# Altium PCB PCB final.PcbDoc
Units mm, origin at the board's own origin, x right, y up, seen from the top; angles counter-clockwise.
Board outline 69.85 x 58.55 mm, 4 copper layers (L1(signal), L2(GND), L3(GND), L4(signal)), stack 1.591 mm thick; 42 components, 40 nets, 177 pads, 159 vias.
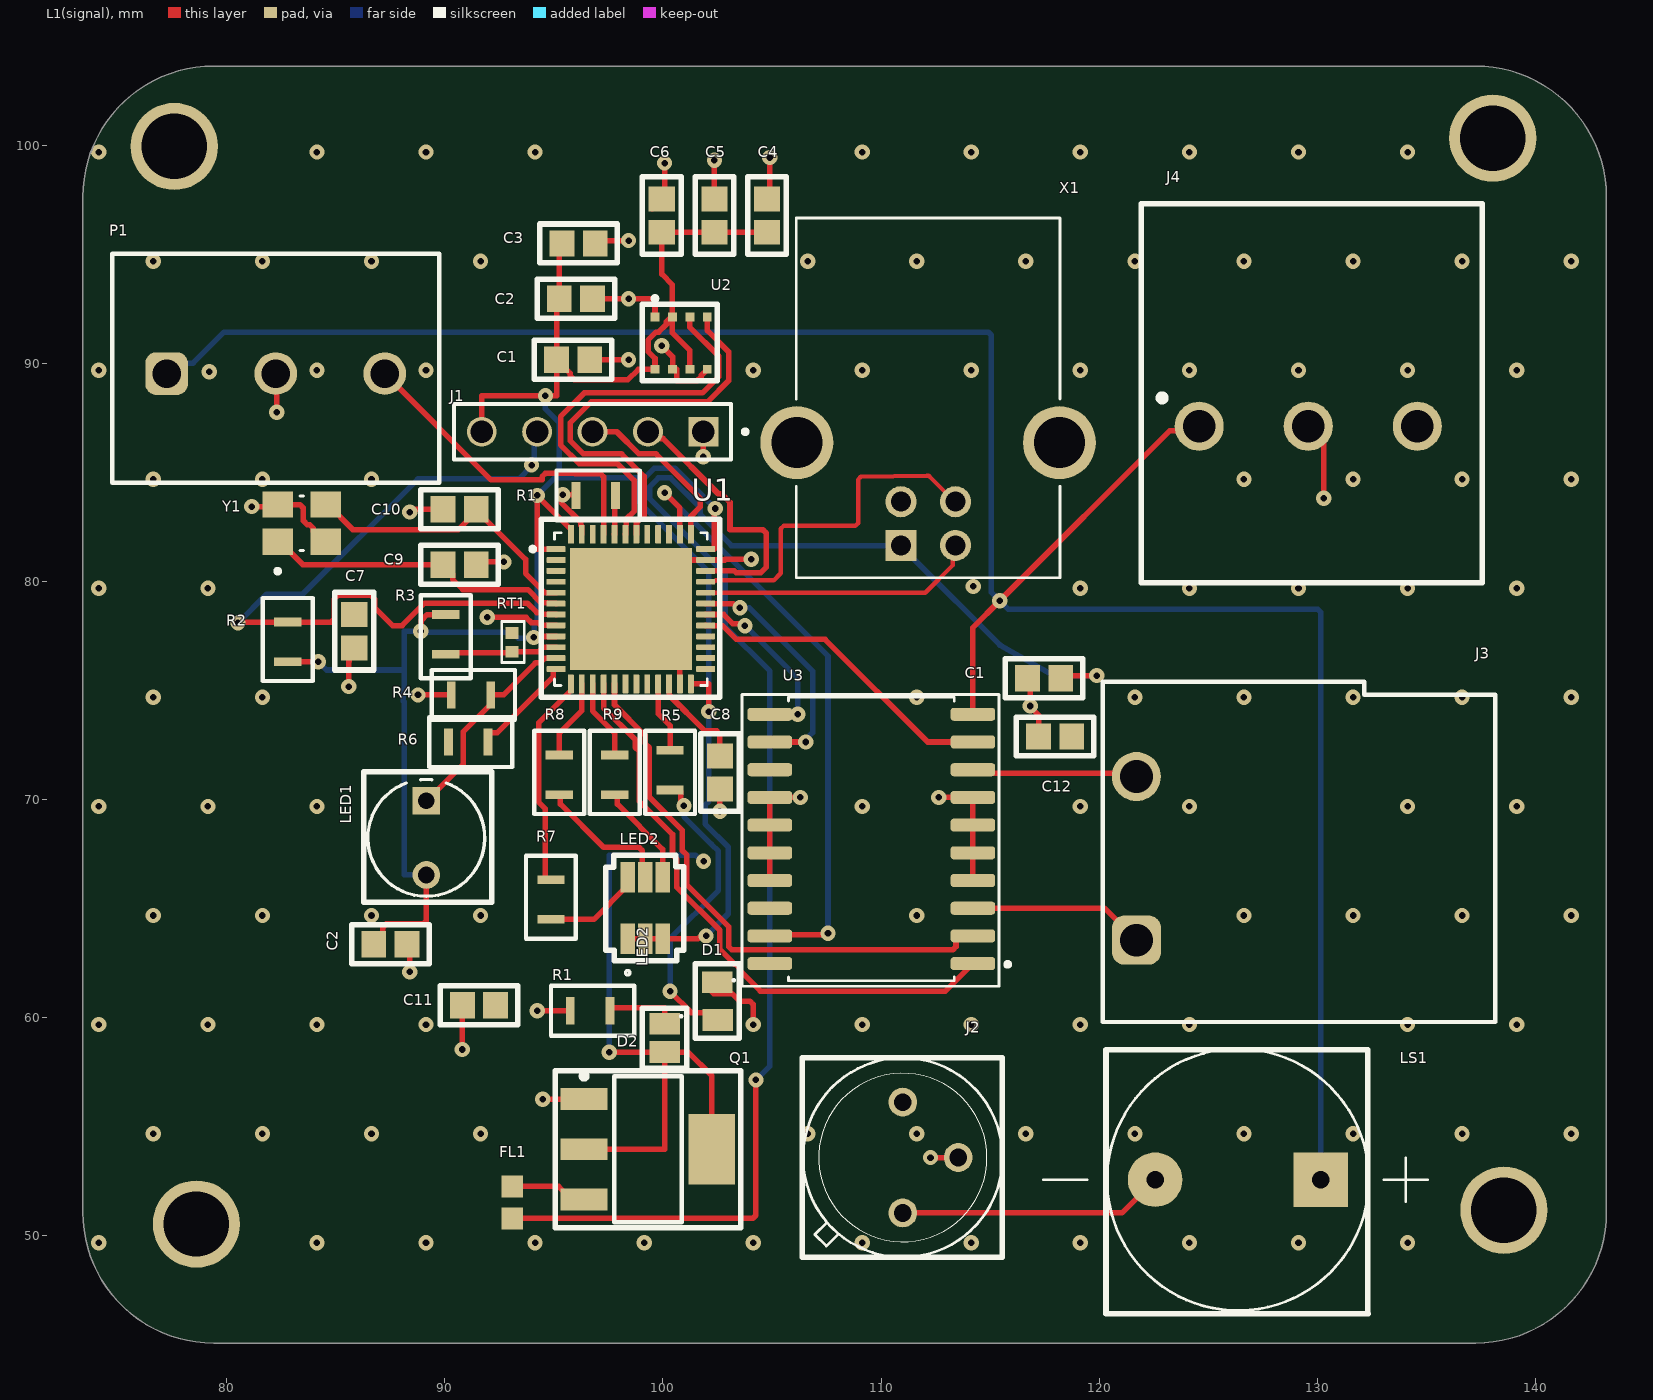
[diagram p0: L1(signal) view]
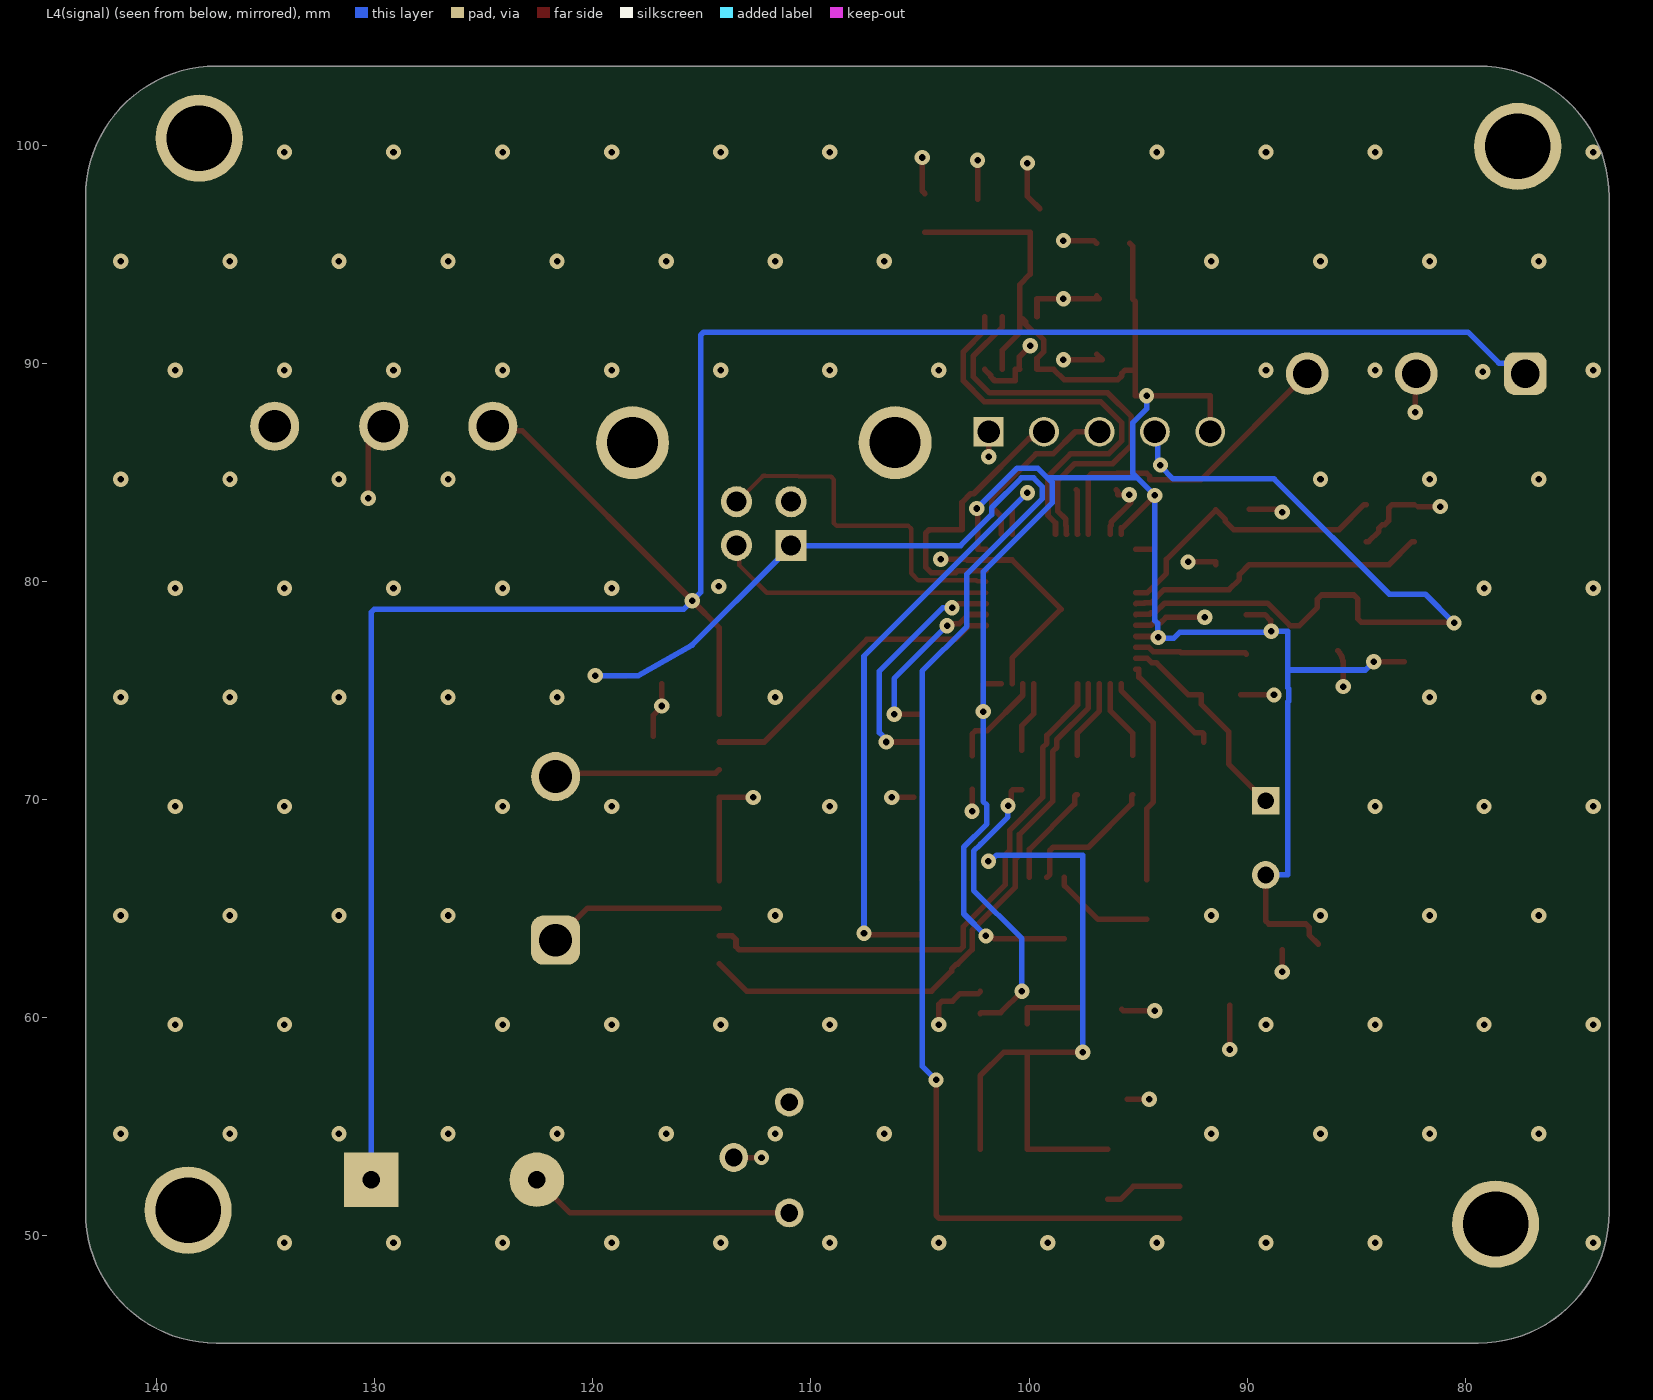
[diagram p1: L4(signal) view, seen from below]
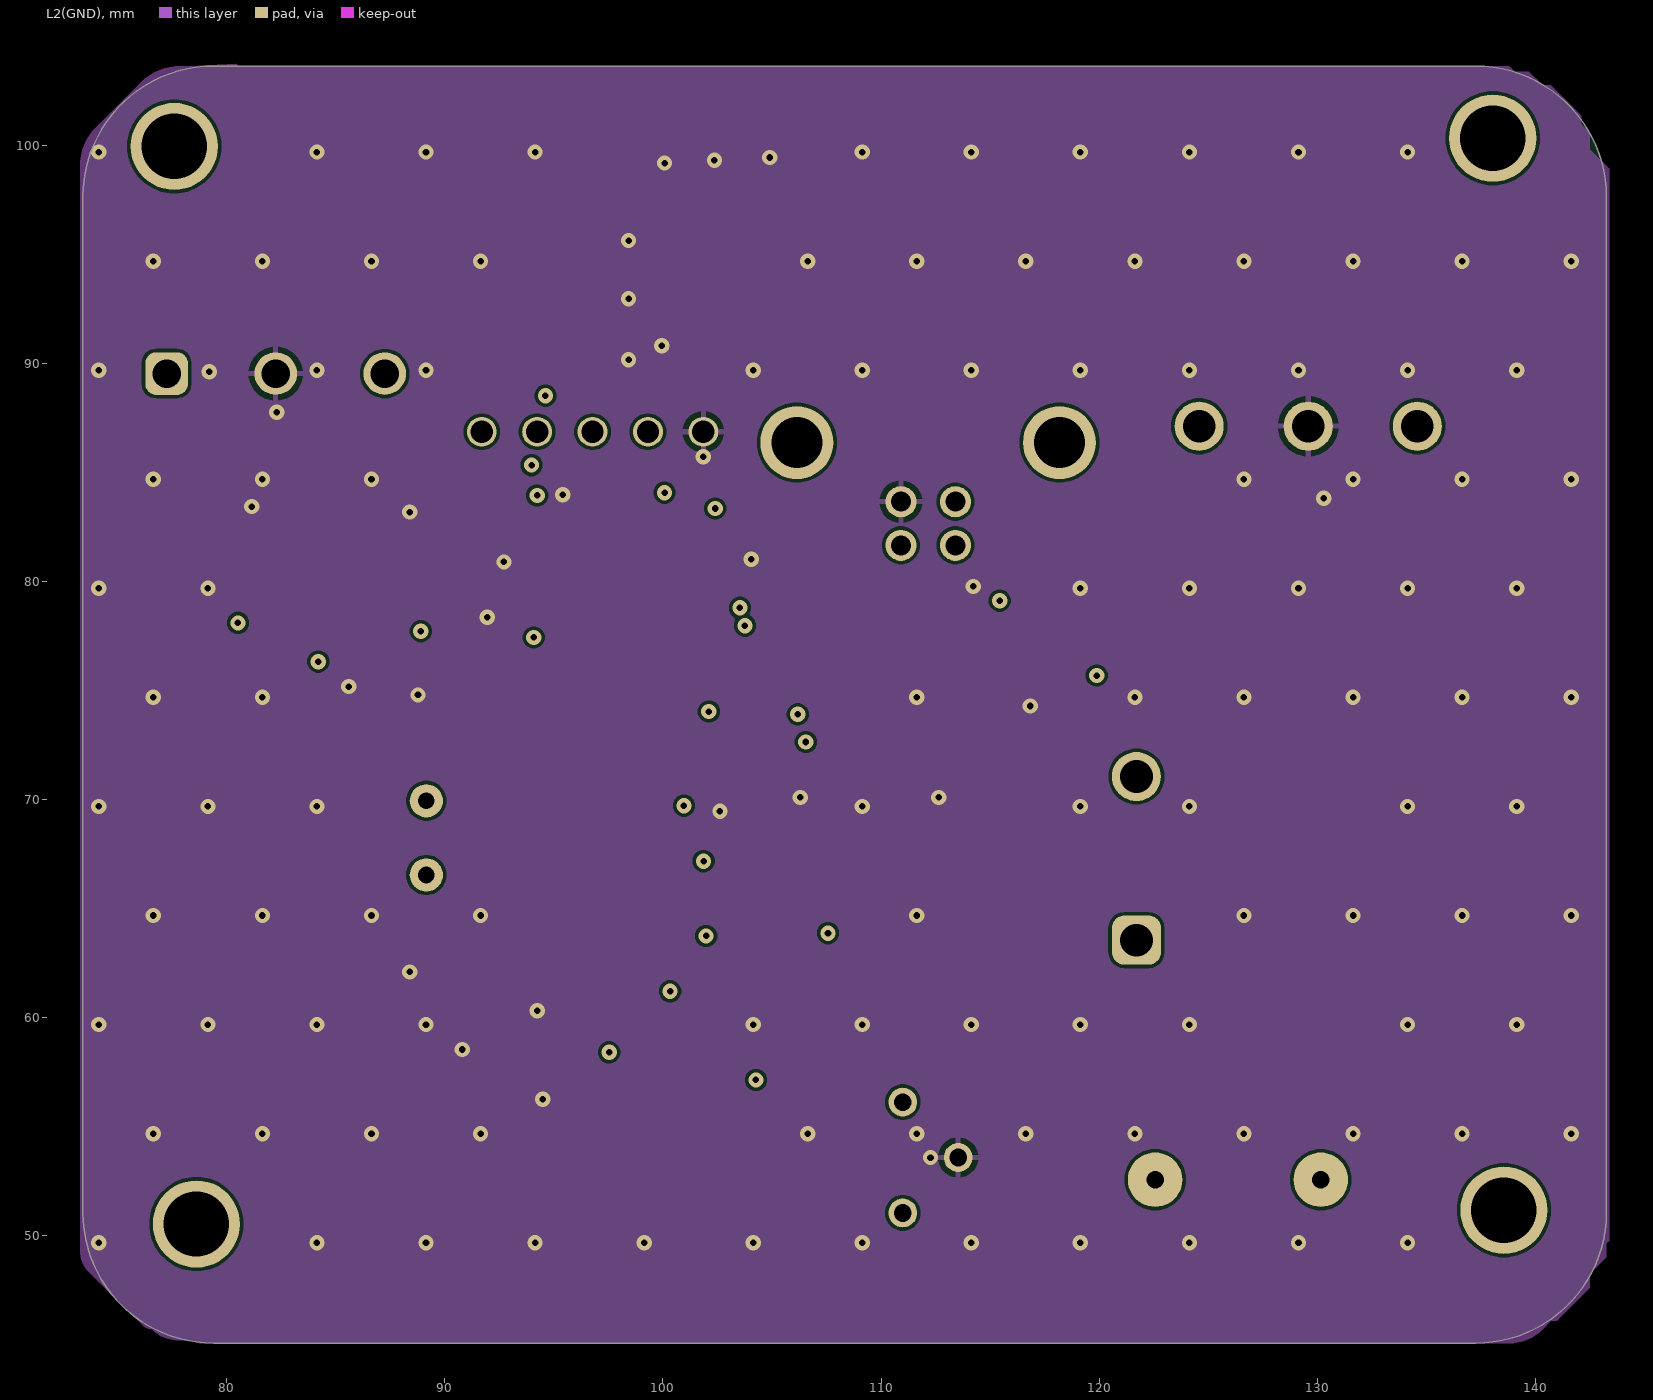
[diagram p2: L2(GND)]
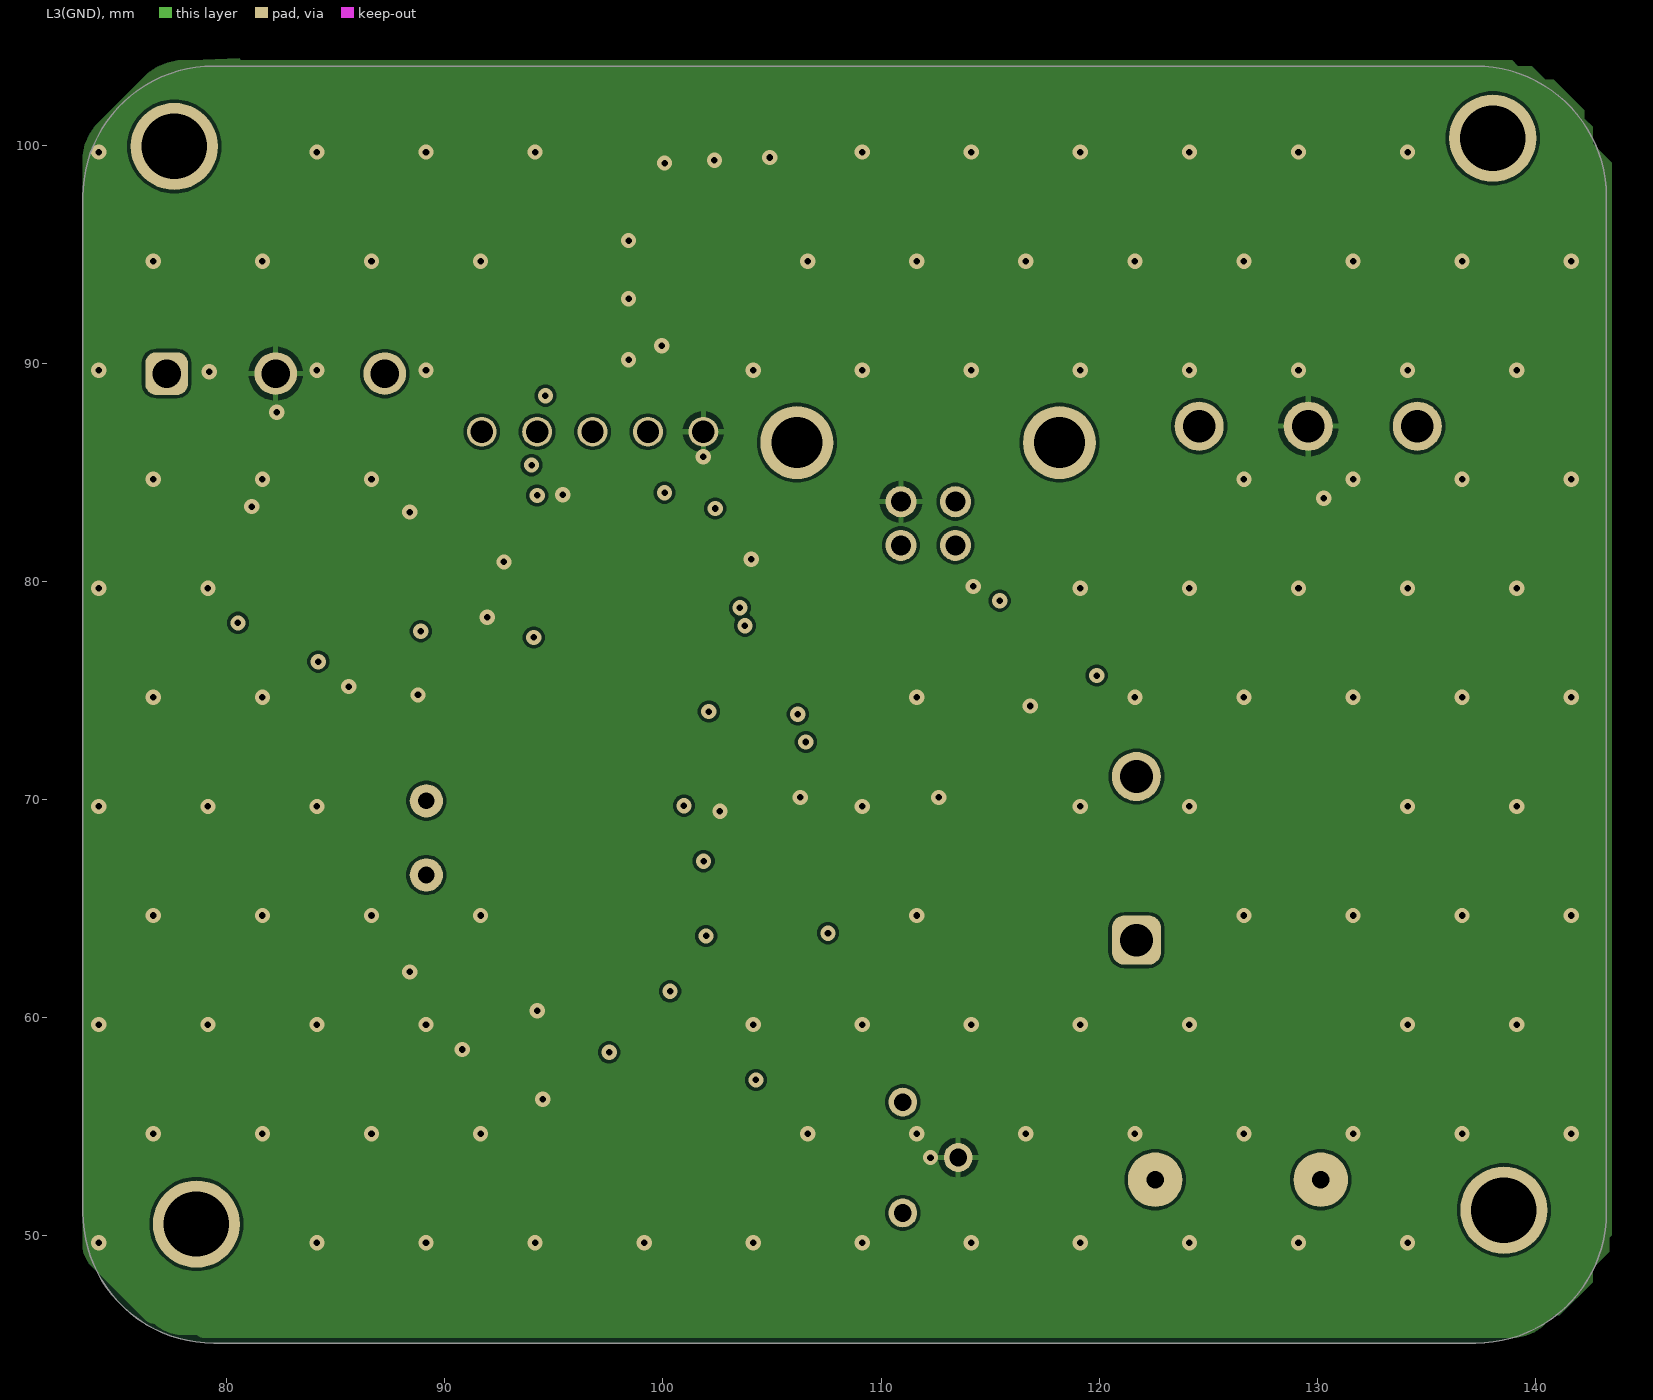
[diagram p3: L3(GND)]

## Layer stack, top to bottom
Top Solder: solder mask 0.0254, SM-001, Dk 4
L1(signal): signal copper 0.035
Dielectric 2: prepreg 0.2104, PP-017, Dk 4.3
L2(GND): signal copper 0.0175
Dielectric 3: core 1.065, Core-039, Dk 4.6
L3(GND): signal copper 0.0175
Dielectric 4: prepreg 0.2104, PP-017, Dk 4.3
L4(signal): signal copper 0.035
Bottom Solder: solder mask 0.0254, SM-001, Dk 4

## Board outline
73.406,51.085 73.406,97.632 cw(c79.406,97.632) 79.406,103.632 137.256,103.632 cw(c137.256,97.632) 143.256,97.632 143.256,51.085 cw(c137.256,51.085) 137.256,45.085 79.406,45.085 cw(c79.406,51.085)

## Design rules (kind name [scope] priority, off if disabled: settings)
Clearance [All] p1: gap=0.15 ignorepadtopadclearanceinfootprint=FALSE except(0.089: Arc-Arc Arc-Track Track-Track; 0.127: Arc-THPad Track-THPad; 0.139: SMDPad-SMDPad; 0.2: Arc-SMDPad Track-SMDPad Fill-Fill Fill-Poly Fill-Region Poly-Poly Poly-Region Region-Region; 0.254: THPad-THPad)
DiffPairsRouting "Schematic Differential Pairs Routing" [All] p1: maxlimit=0.254 minlimit=0.254 mostfreqgap=0.254 toplayer_minwidth=0.381 toplayer_maxwidth=0.381 toplayer_prefwidth=0.381 midlayer1_minwidth=0.381 midlayer1_maxwidth=0.381 midlayer1_prefwidth=0.381 midlayer2_minwidth=0.381 midlayer2_maxwidth=0.381 midlayer2_prefwidth=0.381 bottomlayer_minwidth=0.381 bottomlayer_maxwidth=0.381 bottomlayer_prefwidth=0.381 maxuncoupledlength=12.7
HoleSize [All] p1: absolutevalues=TRUE maxlimit=10 minlimit=0.025 maxpercent=80.000 minpercent=20.000
MinimumSolderMaskSliver [All] p1: minsoldermaskwidth=0
PlaneConnect [All] p1: planeconnectstyle=Direct reliefexpansion=0.508 reliefentries=4 reliefconductorwidth=0.254 reliefairgap=0.254
PolygonConnect [All] p1: connectstyle=Relief reliefconductorwidth=0.254 reliefentries=4 polygonreliefangle="90 Angle" airgapwidth=0.254
RoutingVias [All] p1: holewidth=0.711 width=1.27 viastyle="Through Hole" minholewidth=0.711 minwidth=1.27 maxholewidth=0.711 maxwidth=1.27
SilkToSilkClearance [All] p1: silktosilkclearance=0
SilkToSolderMaskClearance [IsPad] p1: minsilkscreentomaskgap=0 clearancetoexposedcopper=TRUE
SolderMaskExpansion SolderMaskExpansion_Via [IsVia] p1: expansion=0.102 istentingtop=TRUE
SolderMaskExpansion [All] p2: expansion=0.102 istentingtop=FALSE
SupplyNets "Schematic Supply Nets_5" [InNet('+5')] p1: voltage=0.000
SupplyNets "Schematic Supply Nets_4" [InNet('+3V3')] p2: voltage=0.000
SupplyNets "Schematic Supply Nets_3" [InNet('GND')] p3: voltage=0.000
SupplyNets "Schematic Supply Nets" [InNet('VBUS')] p4: voltage=0.000
Width [All] p1: maxlimit=0.3 minlimit=0.15 preferedwidth=0.2 minimp=50.000000 maximp=50.000000 favimp=50.000000
24 further rules are at their usual default settings.

## Classes and differential pairs
component class USB: C1 C2 C12 D2 FL1 J4 Q1 R1 X1
component class Final: C1 C2 C3 C4 C5 C6 C7 C8 C9 C10 C11 D1 J1 J2 J3 LED1 LED2 LS1 P1 R2 R3 R4 R5 R6 R7 R8 R9 RT1 U1 U2 U3 Y1

## Components (designator, comment, footprint, x,y, rotation, side; value= is the part's Value field where it differs from the comment)
C1 "cap_0805_10uf" capa0805 117.475,75.565 r0 top
C1 "cap_0805_2u2" capa0805 95.885,90.17 r180 top
C2 "cap_0805_10uf" capa0805 87.503,63.373 r180 top
C2 "cap_0603_100nf" capa0805 96.012,92.964 r180 top
C3 "cap_0603_100nf" capa0805 96.139,95.504 r180 top
C4 "cap_0603_100nf" capa0805 104.775,96.774 r270 top
C5 "cap_0603_100nf" capa0805 102.362,96.774 r270 top
C6 "cap_0603_100nf" capa0805 99.949,96.774 r270 top
C7 "cap_0603_100nf" capa0805 85.852,77.724 r90 top
C8 "cap_0603_4.7uf" capa0805 102.616,71.247 r270 top
C9 "cap_0603_10pf" capa0805 90.678,80.772 r180 top
C10 "cap_0603_10pf" capa0805 90.678,83.312 r0 top
C11 "cap_0603_100nf" capa0805 91.567,60.579 r0 top
C12 "cap_0603_100nf" capa0805 117.983,72.898 r0 top
D1 "LED_0805" LED_0805#1 102.489,60.706 r90 top
D2 "LED_0805" LED_0805#2 100.076,59.055 r90 top
FL1 "filt_0603 120 Ω" BEADC1608X95N 93.091,51.535 r90 top
J1 "SWD" SAMTEC_MTSW-105-07-T-S-165 96.774,86.868 r0 top
J2 "PIR Sensor" "PIR Sensor" 110.998,53.594 r0 top
J3 "terminal" 691253900002 129.159,67.31 r90 top
J4 "Terminal Block" 691216710003 129.587,87.122 r0 top
LED1 "Photoresistor" Photoresistor 89.154,69.948 r270 top
LED2 "RGB" RGB 99.187,65.024 r90 top
LS1 "Buzzer" Buzzer 126.365,52.578 r180 top
P1 "SERVO" 691386700003 82.249,89.785 r0 top
Q1 "AMS1117" AMS1117 99.314,53.975 r0 top
R1 "res_0805 1K" Res_0805 96.774,60.325 r0 top
R1 "res_0805_10KΩ" Res_0805 97.028,83.947 r0 top
R2 "res_0805_10KΩ" Res_0805 82.804,77.343 r90 top
R3 "res_0805_10KΩ" Res_0805 90.043,77.47 r270 top
R4 "res_0805_10KΩ" Res_0805 91.313,74.803 r0 top
R5 "res_0805_330Ω" Res_0805 100.33,71.247 r270 top
R6 "res_0805_100Ω" Res_0805 91.186,72.644 r0 top
R7 "res_0805_330Ω" Res_0805 94.869,65.532 r90 top
R8 "res_0805_330Ω" Res_0805 95.25,71.247 r90 top
R9 "res_0805_330Ω" Res_0805 97.79,71.247 r90 top
RT1 "NTC Thermistor" "NTC Thermistor" 93.091,77.216 r270 top
U1 "STM32F411" STM32F411 98.532,78.739 r0 top
U2 "Gas Sensor" "Gas Sensor" 100.838,90.932 r90 top
U3 "L293DD" L293DD 109.557,68.199 r180 top
X1 "USB-B1HSB6" USB-B1HSB6 112.161,86.371 r180 top
Y1 "C3E-8.000-8-1015-R" C3E-8.000-8-1015-R 83.439,82.677 r90 top

## Footprints (in the part's own frame and the unit in brackets; to place one, negate y for a bottom-side part, rotate by r counter-clockwise, add the part's x,y. Pads: shape width x height; smd on the part's side, far side on the other; paste and mask are expansions set on the pad)
691216710003 [mm]
  round 2.25 hole 1.5: 1(-5,0) 2(0,0) 3(5,0)
  silkscreen extent -7.65,-7.17 7.98,10.2, body extent -7.57,-7.12 8.03,10.18, height 9.8
691253900002 [mm] "Serie 2539 - 7.50 mm _ 2 pins"
  rrect50% 2.25x2.25 hole 1.5: 1(-3.75,7.45)
  round 2.25 hole 1.5: 2(3.75,7.45)
  silkscreen extent -7.5,-9 8.1,9, body extent -7.5,-9 8.1,9, height 11.35
691386700003 [mm] "5.00mm - PCB Header ( Horizontal / Vertical ), 03p"
  rrect50% 1.95x1.95 hole 1.3: 1(-5,-0.25)
  round 1.95 hole 1.3: 2(0,-0.25) 3(5,-0.25)
  silkscreen extent -7.5,-5.25 7.5,5.25, body extent -7.5,-5.25 7.5,5.25, height 11
AMS1117 [mm] "SOT223, 4-Leads, Body 6.50x7.00mm (avg), Pitch 2.30mm, IPC Medium Density"
  rect 2.15x1 smd: 1(-2.925,2.3) 2(-2.925,0) 3(-2.925,-2.3)
  rect 2.15x3.25 smd: 2(2.925,0)
  silkscreen extent -4.25,-3.6 4.25,3.6, body extent -1.85,-3.35 1.85,3.35, height 1.8
BEADC1608X95N [mm]
  rect 1x0.97 smd: 1(-0.735,0) 2(0.735,0)
Buzzer [mm]
  round 2.5 hole 0.8: N(3.8,0)
  rect 2.5x2.5 / inner round 2.5 / far side rect 2.5x2.5 hole 0.8: P(-3.8,0)
  silkscreen extent -8.69,-6 8.92,6.15, body extent -6,-6 6,6, height 7
C3E-8.000-8-1015-R [mm]
  rect 1.2x1.4 smd: 1(-0.85,1.1) 2(-0.85,-1.1) 3(0.85,-1.1) 4(0.85,1.1)
  silkscreen extent -2.3,-0.08 1.25,1.2, body extent -1.25,-1.6 1.25,1.6, height 0.75
capa0805 [mm] "Chip Capacitor, 2-Leads, Body 2.00x1.25mm, IPC Medium Density"
  rect 1.14x1.2 smd: 1(-0.762,0) 2(0.762,0)
  silkscreen extent -1.78,-0.89 1.78,0.89, body extent -1,-0.64 0.76,0.63, height 1.25
"Gas Sensor" [mm]
  rect 0.4x0.4 smd: 1(1.2,1.2) 2(1.2,0.4) 3(1.2,-0.4) 4(1.2,-1.2) 5(-1.2,-1.2) 6(-1.2,-0.4) 7(-1.2,0.4) 8(-1.2,1.2)
  silkscreen extent -1.78,-1.72 2.14,1.78
L293DD [mm]
  rrect50% 2.05x0.6 smd: 1(-4.655,5.715) 2(-4.655,4.445) 3(-4.655,3.175) 4(-4.655,1.905) 5(-4.655,0.635) 6(-4.655,-0.635) 7(-4.655,-1.905) 8(-4.655,-3.175) 9(-4.655,-4.445) 10(-4.655,-5.715) 11(4.655,-5.715) 12(4.655,-4.445) 13(4.655,-3.175) 14(4.655,-1.905) 15(4.655,-0.635) 16(4.655,0.635) 17(4.655,1.905) 18(4.655,3.175) 19(4.655,4.445) 20(4.655,5.715)
  silkscreen extent -6.35,-6.63 5.92,6.75, body extent -5.16,-6.4 5.16,6.4, height 2.65
LED_0805#1 [mm] "Chip Diode, 2-Leads, Body 2.00x1.20mm, IPC Medium Density"
  rect 1x1.4 smd: 1(-0.8,-0.025) 2(0.925,0)
  silkscreen extent -1.65,-1.02 1.78,1.02, body extent -1,-0.6 1,0.6, height 0.85
LED_0805#2 [mm] "Chip Diode, 2-Leads, Body 2.00x1.20mm, IPC Medium Density"
  rect 1x1.4 smd: 1(-0.625,0) 2(0.675,0)
  silkscreen extent -1.38,-1.02 1.38,1.02, body extent -1,-0.6 1,0.6, height 0.85
"NTC Thermistor" [mm]
  rect 0.54x0.6 smd: 1(-0.432,0) 2(0.432,0)
  silkscreen extent -0.95,-0.48 0.92,0.55, body extent -0.5,-0.25 0.5,0.25, height 0.55
Photoresistor [mil]
  rect 50x50 / inner round 60 / far side rect 50x50 hole 30 paste-99999 mask+0: 1(0,0)
  round 50 / inner round 60 / far side round 50 hole 30 paste-99999 mask+0: 2(133.86,0)
  silkscreen extent -52,-113 183,118, body extent -34,-100 167,101, height 95
"PIR Sensor" [mil]
  round 52 hole 32: 1(0,-100) 2(100,0) 3(0,100)
  silkscreen extent -181,-180 180,180, body extent -181,-181 181,181, height 185
Res_0805 [mm] "Chip Resistor, 2-Leads, Body 2.00x1.25mm, IPC Medium Density"
  rect 0.4x1.25 smd: 1(-1.016,0) 2(0.8,0)
  silkscreen extent -1.91,-1.14 1.91,1.14, body extent -1,-0.63 1,0.63, height 0.5
RGB [mil]
  rect 55x26 smd paste+0 mask+0: 1(-55.5,31.5) 2(-55.5,0) 3(-55.5,-31.5) 4(55.5,-31.5) 5(55.5,0) 6(55.5,31.5)
  silkscreen extent -120,-70 95,71, body extent -71,-59 71,59, height 79
SAMTEC_MTSW-105-07-T-S-165 [mm]
  rect 1.37x1.37 / inner round 1.37 / far side rect 1.37x1.37 hole 1.02: 01(5.08,0)
  round 1.37 hole 1.02: 02(2.54,0) 03(0,0) 04(-2.54,0) 05(-5.08,0)
  silkscreen extent -6.35,-1.27 7.1,1.27
STM32F411 [mm]
  rrect25% 0.87x0.27 smd: 1(-3.43,2.75) 2(-3.43,2.25) 3(-3.43,1.75) 4(-3.43,1.25) 5(-3.43,0.75) 6(-3.43,0.25) 7(-3.43,-0.25) 8(-3.43,-0.75) 9(-3.43,-1.25) 10(-3.43,-1.75) 11(-3.43,-2.25) 12(-3.43,-2.75) 25(3.43,-2.75) 26(3.43,-2.25) 27(3.43,-1.75) 28(3.43,-1.25) 29(3.43,-0.75) 30(3.43,-0.25) 31(3.43,0.25) 32(3.43,0.75) 33(3.43,1.25) 34(3.43,1.75) 35(3.43,2.25) 36(3.43,2.75)
  rrect25% 0.27x0.87 smd: 13(-2.75,-3.43) 14(-2.25,-3.43) 15(-1.75,-3.43) 16(-1.25,-3.43) 17(-0.75,-3.43) 18(-0.25,-3.43) 19(0.25,-3.43) 20(0.75,-3.43) 21(1.25,-3.43) 22(1.75,-3.43) 23(2.25,-3.43) 24(2.75,-3.43) 37(2.75,3.43) 38(2.25,3.43) 39(1.75,3.43) 40(1.25,3.43) 41(0.75,3.43) 42(0.25,3.43) 43(-0.25,3.43) 44(-0.75,3.43) 45(-1.25,3.43) 46(-1.75,3.43) 47(-2.25,3.43) 48(-2.75,3.43)
  rect 5.6x5.6 smd paste-4: 49(0,0)
  silkscreen extent -4.6,-4.05 4.08,4.13
USB-B1HSB6 [mm]
  rect 1.428x1.428 / inner round 1.428 / far side rect 1.428x1.428 hole 0.92: 1(1.25,4.71)
  round 1.428 hole 0.92: 2(-1.25,4.71) 3(-1.25,2.71) 4(1.25,2.71)
  round 3.346 hole 2.33: P1(-6.02,0) P2(6.02,0)
  silkscreen extent -6.05,-10.3 6.05,6.2, body extent -7.42,-8.25 7.42,8.25, height 10.9

## Part data
C1 C2: MFR="Samsung Electro-Mechanics", MFR part=CL21A106KAYNNNE, ComponentLink1Description=buy, ComponentLink1URL=https://www.lcsc.com/product-detail/C15850.html?spm=wm.fly.bg.2.xh___wm.fly.tp.3.ml&lcsc_vid=EQMKBQFTFldaAV0ERFFdUwBeRAQMVV0CRgdWAlFeEVExVlNeQFBaV1xRQ1ZbUjsOAxUeFF5JWBYZEEoBGA4JCwFIFA4DSA%3D%3D, supplier=lcsc, supplier part=C15850
C1: MFR="Samsung Electro-Mechanics", MFR part=CL10A225KO8NNNC, ComponentLink1Description=buy, ComponentLink1URL=https://www.lcsc.com/product-detail/C23630.html?s_z=n_q_capacitor%25200603%25202.2u&spm=wm.fly.bg.0.xh&lcsc_vid=FlldVwBSQFlXXgVVFQBbUAUARABdUVEAEllcVQYAEgMxVlNeT1FXUFJRRFNfVTsOAxUeFF5JWBYZEEoKFBINSQcJGk4dBgkWGwQd, supplier=lcsc, supplier part=C23630
C2 C3 C4 C5 C6 C7 C11 C12: MFR="Samsung Electro-Mechanics", MFR part=CL10B104KB8NNNC, ComponentLink1Description=buy, supplier=lcsc, supplier part=C1591
  C2 C3 C4 C5 C6 C7 C11: ComponentLink1URL=https://www.lcsc.com/product-detail/C15850.html?spm=wm.fly.bg.2.xh___wm.fly.tp.3.ml&lcsc_vid=EQMKBQFTFldaAV0ERFFdUwBeRAQMVV0CRgdWAlFeEVExVlNeQFBaV1xRQ1ZbUjsOAxUeFF5JWBYZEEoBGA4JCwFIFA4DSA%3D%3D
  C12: ComponentLink1URL=https://www.lcsc.com/product-detail/C1591.html?s_z=n_q_t_Capacitors%2520100nf&spm=wm.fly.bg.0.xh___wm.ssy.tc.0.tz&lcsc_vid=EQJbUwEATwBfUlMDRFFfBlZSEVNfAV1WQFgPU1dQRAIxVlNeTlBZVFNTQFlWVTsOAxUeFF5JWBYZEEoKFBINSQcJGk4dAgUUFAk%3D
C8: MFR="Samsung Electro-Mechanics", MFR part=CL10A475KP8NNNC, ComponentLink1Description=buy, ComponentLink1URL=https://www.lcsc.com/product-detail/C1705.html?s_z=n_q_capacitor%25200603%25204.7u&spm=wm.fly.bg.0.xh&lcsc_vid=FlldVwBSQFlXXgVVFQBbUAUARABdUVEAEllcVQYAEgMxVlNeT1BeUVBTQ1lcVzsOAxUeFF5JWBYZEEoKFBINSQcJGk4dAgUUFAk%3D, supplier=lcsc, supplier part=C1705
C9 C10: MFR="Samsung Electro-Mechanics", MFR part=CL10C100JB8NNNC, ComponentLink1Description=buy, ComponentLink1URL=https://www.lcsc.com/product-detail/C1634.html?s_z=n_q_p_Samsung%2520Electro-Mechanics%2520CL21A106KAYNNNE%252010pf&spm=wm.ssy.bg.1.xh&lcsc_vid=EQMKBQFTFldaAV0ERFFdUwBeRAQMVV0CRgdWAlFeEVExVlNeQFlfX1FURVNWXzsOAxUeFF5JWBYZEEoKFBINSQcJGk4eFQsCAgIaSgADAwAHC0slRlRWUlRIHxUDCw%3D%3D, supplier=lcsc, supplier part=C1634
D1 D2: MFR=YONGYUTAI, MFR part=YLED0805R, ComponentLink1Description=buy, ComponentLink1URL=https://www.lcsc.com/product-detail/C19171391.html?s_z=n_q_t_LED%25200805&spm=wm.fly.bg.0.xh___wm.ssy.tc.0.tz&lcsc_vid=EQMKBQFTFldaAV0ERFFdUwBeRAQMVV0CRgdWAlFeEVExVlNeQFVbXl1XRlJdUTsOAxUeFF5JWBYZEEoKFBINSQcJGk4eFQsCAgIaSgADAwAHC0slRVlaVFxWTk8GEwkK, supplier=lcsc, supplier part=C19171391
FL1: library part filt_0603, MFR=muRata, MFR part=BLM18EG121SH1D, ComponentLink1Description=buy, ComponentLink1URL=https://www.lcsc.com/product-detail/C160979.html?s_z=n_q_BLM18EG121SH1D&spm=wm.fly.bg.0.xh&lcsc_vid=EQMKBQFTFldaAV0ERFFdUwBeRAQMVV0CRgdWAlFeEVExVlNeQFlfVVFQT1VbVzsOAxUeFF5JWBYZEEoKFBINSQcJGk4eFQsCAgIaSgADAwAHC0slQFJfU1BeTk8GEwkK, supplier=lcsc, supplier part=C160979
J1: library part MTSW-105-07-T-S-165, MFR=Samtec, ComponentLink1Description=buy, ComponentLink1URL=https://www.lcsc.com/product-detail/C3335287.html?s_z=n_q_MTSW-105-07-T-S-165&spm=wm.fly.bg.0.xh&lcsc_vid=EQMKBQFTFldaAV0ERFFdUwBeRAQMVV0CRgdWAlFeEVExVlNeQFlfVlVfRVVfVzsOAxUeFF5JWBYZEEoKFBINSQcJGk4dAgUUFAk%3D, MFR part=MTSW-105-07-T-S-165, supplier=lcsc, supplier part=C3335287
J2: MFR=Zilog, MFR part=ZRE200GE, ComponentLink1Description=buy, ComponentLink1URL=https://www.lcsc.com/product-detail/C3678733.html?s_z=n_q_ZRE200GE&spm=wm.fly.bg.0.xh&lcsc_vid=EQJbUwEATwBfUlMDRFFfBlZSEVNfAV1WQFgPU1dQRAIxVlNeT1JXU1FXRFRaUTsOAxUeFF5JWBYZEEoKFBINSQcJGk4NBhADEA4cHktXRlRbSQwSGg0%3D, supplier=lcsc, supplier part=C3678733
J3: library part CMP-1502-02710-3, "Terminal Block, 7.5MM Pitch, Vertical, Rising Cage Clamp, 12-30 AWG, 2 Pin"
J4: MFR=MAX, MFR part=MX126-5.0-02P-GN01-Cu-S-A, ComponentLink1Description=buy, ComponentLink1URL=https://www.lcsc.com/product-detail/C5188434.html?s_z=n_q_t_Terminal%2520Block%2520&spm=wm.fly.bg.17.xh___wm.ssy.tc.0.tz&lcsc_vid=EQJbUwEATwBfUlMDRFFfBlZSEVNfAV1WQFgPU1dQRAIxVlNeTlNfXl1VQVZfXzsOAxUeFF5JWBYZEEoKFBINSQcJGk4dAgUUFAk%3D, supplier=lcsc, supplier part=C5188434
LED1: MFR=JCHL, MFR part=GL5528(10-20), ComponentLink1Description=buy, ComponentLink1URL=https://www.lcsc.com/product-detail/C10081.html?s_z=n_q_GL5528&spm=wm.fly.bg.1.xh&lcsc_vid=EQJbUwEATwBfUlMDRFFfBlZSEVNfAV1WQFgPU1dQRAIxVlNeTlBYXlFWQFlZUDsOAxUeFF5JWBYZEEoKFBINSQcJGk4NBhADEA4cHktXRVdeSQwSGg0%3D, supplier=lcsc, supplier part=C10081
LED2: MFR=Broadcom, MFR part=ASMT-YTD7-0AA02, ComponentLink1Description=buy, ComponentLink1URL=https://www.lcsc.com/product-detail/C3018557.html?s_z=n_q_ASMT-YTD7-0AA02&spm=wm.fly.bg.0.xh&lcsc_vid=EQJbUwEATwBfUlMDRFFfBlZSEVNfAV1WQFgPU1dQRAIxVlNeTlBZV1JRR1NZVzsOAxUeFF5JWBYZEEoKFBINSQcJGk4eFQsCAgIaSgADAwAHC0slRFFfX1FTQE8GEwkK, supplier=lcsc, supplier part=C3018557
LS1: MFR=CUI, MFR part=CMI-1210-5-95T, ComponentLink1Description=buy, ComponentLink1URL=https://www.lcsc.com/product-detail/C6485139.html?s_z=n_q_CMI-1210-5-95T&spm=wm.fly.bg.0.xh&lcsc_vid=EQJbUwEATwBfUlMDRFFfBlZSEVNfAV1WQFgPU1dQRAIxVlNeT1JXUVNSQlVaVzsOAxUeFF5JWBYZEEoKFBINSQcJGk4dAgUUFAk%3D, supplier=lcsc, supplier part=C6485139
P1: library part CMP-1502-02091-3, "Terminal Block, 5.00MM, Male Pcb Horizontal/vertical Cab Divisible, 3 Pins", Color=Grey, Current=14A, Max Operating Temperature=130°C, Min Operating Temperature=-30°C, Voltage=300V, Lead Pitch=5mm, Mount="Through Hole", Number of Levels=1, Number of Pins=3, Number of Positions=3, Number of Positions Per Level=3, Orientation=Vertical, Packaging=Box, Pitch=5.0038mm, RoHS=Compliant, Termination=Solder
Q1: MFR="Advanced Monolithic Systems", MFR part=AMS1117-3.3, ComponentLink1Description=buy, ComponentLink1URL=https://www.lcsc.com/product-detail/C6186.html?s_z=n_q_Advanced%2520Monolithic%2520Systems%2520AMS1117-3.3&spm=wm.fly.bg.0.xh&lcsc_vid=EQMKBQFTFldaAV0ERFFdUwBeRAQMVV0CRgdWAlFeEVExVlNeQFlfU1NQQlNZXzsOAxUeFF5JWBYZEEoKFBINSQcJGk4eFQsCAgIaSgADAwAHC0slQVBWUEoOAwwC, supplier=lcsc, supplier part=C6186
R1 R1: library part res_0805, MFR=FOJAN, MFR part=FRC0805F1001TS, ComponentLink1Description=buy, ComponentLink1URL=https://www.lcsc.com/product-detail/C2907232.html?s_z=n_q_t_0805%25201K%2520resistor&spm=wm.fly.bg.0.xh___wm.ssy.tc.0.tz&lcsc_vid=EQMKBQFTFldaAV0ERFFdUwBeRAQMVV0CRgdWAlFeEVExVlNeQFVbU1VVRVNeUDsOAxUeFF5JWBYZEEoKFBINSQcJGk4%3D, supplier=lcsc, supplier part=C2907232
R2 R3 R4: MFR=YAGEO, MFR part=RC0603FR-0710KL, ComponentLink1Description=buy, ComponentLink1URL=https://www.lcsc.com/product-detail/C98220.html?s_z=n_q_t_Resistors%25200603%252010K%25CE%25A9&spm=wm.fly.bg.0.xh___wm.ssy.tc.0.tz&lcsc_vid=FlldVwBSQFlXXgVVFQBbUAUARABdUVEAEllcVQYAEgMxVlNeT1FXX1FVQFRcVDsOAxUeFF5JWBYZEEoKFBINSQcJGk4dAgUUFAk%3D, supplier=lcsc, supplier part=C98220
R5 R7 R8 R9: MFR=UNI-ROYAL, MFR part=0805W8F3300T5E, ComponentLink1Description=buy, ComponentLink1URL=https://www.lcsc.com/product-detail/C17630.html?s_z=n_q_Resistor%25200805%2520330%25CE%25A9&spm=wm.fly.bg.0.xh&lcsc_vid=EQJbUwEATwBfUlMDRFFfBlZSEVNfAV1WQFgPU1dQRAIxVlNeTlBWVlZXT1ldXzsOAxUeFF5JWBYZEEoKFBINSQcJGk4NBhADEA4cHktXRlhXSQwSGg0%3D, supplier=lcsc, supplier part=C17630
R6: MFR=YAGEO, MFR part=RC0805FR-07100RL, ComponentLink1Description=buy, ComponentLink1URL=https://www.lcsc.com/product-detail/C2907219.html?s_z=n_q_t_Resistor%25200805%2520100&spm=wm.fly.bg.0.xh___wm.ssy.tc.0.tz&lcsc_vid=EQJbUwEATwBfUlMDRFFfBlZSEVNfAV1WQFgPU1dQRAIxVlNeTlBWV1ZVRFlfUjsOAxUeFF5JWBYZEEoKFBINSQcJGk4NBhADEA4cHktXRVFfSQwSGg0%3D, supplier=lcsc, supplier part=C105577
RT1: MFR=muRata, MFR part=NCU15WF104D60RC, ComponentLink1Description=buy, ComponentLink1URL=https://www.lcsc.com/product-detail/C426654.html?s_z=n_q_NCU15WF104D60RC&spm=wm.fly.bg.0.xh&lcsc_vid=EQJbUwEATwBfUlMDRFFfBlZSEVNfAV1WQFgPU1dQRAIxVlNeT1JXVFVQQ1ZaVjsOAxUeFF5JWBYZEEoKFBINSQcJGk4NBhADEA4cHktXRVZcSQwSGg0%3D, supplier=lcsc, supplier part=C426654
U1: MFR=ST, MFR part=STM32F411CEU6, ComponentLink1Description=buy, ComponentLink1URL=https://www.lcsc.com/product-detail/C60420.html?s_z=n_q_STM32F411CEU6&spm=wm.fly.bg.0.xh&lcsc_vid=EQMKBQFTFldaAV0ERFFdUwBeRAQMVV0CRgdWAlFeEVExVlNeQFleUVFVT1hWUzsOAxUeFF5JWBYZEEoKFBINSQcJGk4NBhADEA4cHktfQ1BADxALGw%3D%3D, supplier=lcsc, supplier part=C60420
U2: MFR=Bosch, MFR part=BME688, ComponentLink1Description=buy, ComponentLink1URL=https://www.lcsc.com/product-detail/C3664478.html?s_z=n_q_x_BME688&spm=wm.ssy.em.0.tz&lcsc_vid=EQJbUwEATwBfUlMDRFFfBlZSEVNfAV1WQFgPU1dQRAIxVlNeT1RcVVRTR1BZXzsOAxUeFF5JWBYZEEoKFBINSQcJGk4dAgUUFAk%3D, supplier=lcsc, supplier part=C3664478
U3: MFR=ST, ComponentLink1Description=buy, ComponentLink1URL=https://www.lcsc.com/product-detail/C2971293.html?s_z=n_q_x_L293DD&spm=wm.ssy.em.0.tz&lcsc_vid=EQJbUwEATwBfUlMDRFFfBlZSEVNfAV1WQFgPU1dQRAIxVlNeT1JXVVBSTlJaUzsOAxUeFF5JWBYZEEoKFBINSQcJGk4%3D, MFR part=L293DD, supplier=lcsc, supplier part=C2971293
X1: MFR="On-Shore Tech", ComponentLink1Description=buy, ComponentLink1URL=https://www.lcsc.com/product-detail/C3197678.html?s_z=n_q_USB-B1HSB6&spm=wm.fly.bg.0.xh&lcsc_vid=EQMKBQFTFldaAV0ERFFdUwBeRAQMVV0CRgdWAlFeEVExVlNeQFRYX1ZXT1ddUjsOAxUeFF5JWBYZEEoKFBINSQcJGk4eFQsCAgIaSgADAwAHC0slQldcXlReQ08GEwkK, MFR part=USB-B1HSB6, supplier=lcsc, supplier part=C3197678
Y1: MFR=AKER, ComponentLink1Description=buy, ComponentLink1URL=https://www.lcsc.com/product-detail/C5588720.html?s_z=n_q_C3E-8.000-8-1015-R&spm=wm.fly.bg.0.xh&lcsc_vid=EQMKBQFTFldaAV0ERFFdUwBeRAQMVV0CRgdWAlFeEVExVlNeQFleX1FRT1FXVzsOAxUeFF5JWBYZEEoKFBINSQcJGk4eFQsCAgIaSgADAwAHC0slQVFaVVRIHxUDCw%3D%3D, MFR part=C3E-8.000-8-1015-R, supplier=lcsc, supplier part=C5588720

## Free pads (board coordinates)
  round 4 hole 3: 2(77.597,99.949) 2(78.613,50.546) 2(138.049,100.33) 2(138.557,51.181)

## Via types
v1: diameter 0.7, hole 0.3, L1(signal) to L4(signal), tented both sides, 159 vias

## Nets (pads, with @x,y where several pads share a name; then routed paths per layer and width w, separated by ;. In a path a pad name is that pad's centre, name@x,y a point inside that pad or via, vN(x,y) a via of type N, cw(c..) or ccw(c..) an arc to the next point about the centre after c; other vN are vias at no path point)
+3V3: C1.2@95.123,90.17 C2.2 C3.2 C4.2 C5.2 C6.2 J1.05 LED1.2 LED2.1 LED2.2 LED2.3 R2.1 R3.1 U1.1 U1.9 U1.24 U1.36 U1.48 U2.2 U2.6 U2.8 | length 121
  L1(signal) w0.254: R2.1 v1(84.201,76.327) ; C2.2@86.741,63.373 87.164,63.796 87.164,64.151 87.312,64.3 89.005,64.3 89.154,64.449 LED1.2 ; v1(88.9,77.724) 88.929,77.753 88.929,78.221 89.19,78.483 90.04,78.483 R3.1 ; J1.05 91.694,88.519 v1(94.615,88.519) 95.123,88.519 C1.2@95.123,89.732 ; v1(94.079,77.438) 94.122,77.481 95.094,77.481 U1.9 ; U1.1 94.234,81.489 v1(94.234,83.947) 95.704,82.477 95.774,82.477 95.782,82.469 U1.48 ; C3.2 95.25,95.377 95.25,92.964 95.123,92.837 95.123,90.17 C1.2@95.123,89.732 ; LED2.1 LED2.2 LED2.3 101.609,63.614 101.664,63.669 101.896,63.669 v1(101.981,63.754) ; U2.6 101.238,90.6 100.438,91.4 U2.2 ; U1.24 102.108,75.309 v1(102.108,74.041) ; U1.36 102.362,81.489 102.362,83.312 v1(102.4,83.35) ; C4.2 C5.2 C6.2 99.949,94.095 100.438,93.606 U2.2 ; C1.2@95.123,89.732 95.158,89.697 95.601,89.697 95.75,89.548 95.75,89.435 95.942,89.243 98.385,89.243 98.874,89.732 U2.8 99.638,90.229 99.322,90.545 99.322,91.065 99.689,91.432 99.8,91.432 100.165,91.797 100.165,91.91 100.314,92.059 100.365,92.059 U2.2
  L4(signal) w0.254: v1(84.201,76.327) 84.582,75.946 88.138,75.946 ; LED1.2 88.138,66.548 88.138,74.481 88.096,74.523 88.096,75.083 88.138,75.125 88.138,75.946 ; v1@94.061,77.394 94.101,77.354 94.107,77.359 94.107,78.085 94.234,78.212 v1(94.234,83.947) 95.246,84.959 ; v1(94.079,77.438) 94.034,77.394 93.37,77.394 93.083,77.681 88.943,77.681 v1(88.9,77.724) 88.138,77.724 88.138,75.946 ; v1(94.615,88.519) 94.615,87.918 95.246,87.287 95.246,84.984 ; 95.074,84.751 99.154,84.751 ; v1(101.981,63.754) 102.997,64.77 102.997,67.826 101.939,68.884 101.939,69.749 102.108,69.918 v1(102.108,74.041) 102.108,80.443 98.945,83.606 98.945,84.542 99.154,84.751 ; v1(102.4,83.35) 100.544,85.205 99.608,85.205 99.154,84.751
+5: U3.20
+5V_EXT: J4.1 LS1.P P1.1 U3.10 | length 110.5
  L1(signal) w0.254: U3.10 114.212,77.89 v1(115.443,79.121) 123.23,86.908 124.344,86.908 J4.1@124.812,87.376
  L4(signal) w0.254: P1.1 77.727,90.013 78.456,90.013 79.883,91.44 114.915,91.44 115.064,91.291 115.064,79.5 115.824,78.74 130.016,78.74 130.165,78.591 LS1.P
A0: R3.2 RT1.2 U1.10 | length 5.2
  L1(signal) w0.254: R3.2 90.1,76.727 93.034,76.727 RT1.2 94.311,76.784 94.508,76.981 95.094,76.981 U1.10
A1: LED1.1 R4.2 U1.11 | length 9.8
  L1(signal) w0.254: LED1.1 90.851,71.645 90.851,73.116 92.113,74.378 R4.2 92.694,74.803 94.159,76.268 94.368,76.268 94.581,76.481 95.094,76.481 U1.11
A2: R6.2 U1.12 | length 4.9
  L1(signal) w0.254: R6.2 91.986,72.999 92.059,73.072 92.414,73.072 94.964,75.622 94.964,75.981 94.972,75.989 U1.12
A3: R7.2 U1.13 | length 9.7
  L1(signal) w0.254: R7.2@94.615,66.332 94.615,69.579 94.298,69.896 94.298,73.525 95.782,75.009 U1.13
A4: R8.2 U1.14 | length 3.7
  L1(signal) w0.254: R8.2 95.25,73.049 96.282,74.08 U1.14
A5: R9.2 U1.15 | length 3.7
  L1(signal) w0.254: U1.15 96.782,74.069 97.79,73.061 R9.2
A6: U1.16 U3.1 | length 27.4
  L1(signal) w0.254: U1.16 97.282,74.211 98.733,72.76 98.733,72.391 98.924,72.2 98.924,69.924 100.441,68.406 100.441,67.471 100.644,67.268 100.644,65.977 102.608,64.014 102.608,63.127 103.277,62.458 103.324,62.458 103.55,62.232 103.55,62.136 104.466,61.221 112.949,61.221 U3.1
A7: U1.17 U3.2 | length 25.9
  L1(signal) w0.254: U1.17 97.782,74.353 99.187,72.948 99.187,72.579 99.378,72.388 99.378,70.112 100.895,68.594 100.895,67.659 101.098,67.456 101.098,66.095 103.012,64.181 103.012,63.26 103.161,63.111 113.289,63.111 113.438,63.26 113.438,63.583 113.61,63.754 U3.2
A8: U1.29 U3.9 | length 14.5
  L1(signal) w0.254: U1.29 101.97,77.981 102.74,77.981 103.372,77.349 107.436,77.349 112.141,72.644 U3.9
A9: U1.30 U3.11 | length 8.4
  L1(signal) w0.254: U1.30 102.782,78.489 103.21,78.062 103.675,78.062 v1(103.761,77.976) ; U3.11 v1(106.184,73.914)
  L4(signal) w0.254: v1(103.761,77.976) 106.184,75.553 v1(106.184,73.914)
A10: U1.31 U3.12 | length 11.2
  L1(signal) w0.254: U1.31 103.216,78.989 103.41,78.795 v1(103.531,78.795) ; U3.12 v1(106.553,72.644)
  L4(signal) w0.254: v1(103.531,78.795) 103.539,78.802 103.951,78.802 106.861,75.892 106.861,73.073 106.553,72.765 v1(106.553,72.644)
A15: U1.38 U3.19 | length 28.2
  L1(signal) w0.254: v1(100.076,84.074) 100.782,83.368 U1.38 ; U3.19 104.965,63.817 107.505,63.817 v1(107.569,63.881)
  L4(signal) w0.254: v1(100.076,84.074) 107.569,76.581 v1(107.569,63.881)
GND: C1.1 C2.1 C3.1 C4.1 C5.1 C6.1 C7.1 C8.2 C9.1 C10.1 C11.1 C12.1 D1.2 J1.01 J2.2 J4.2 P1.2 Q1.1 R1.1 R4.1 U1.8 U1.23 U1.35 U1.47 U1.49 U2.1 U2.5 U2.7 U3.4 U3.5 U3.6 U3.7 U3.14 U3.15 U3.16 U3.17 X1.4 Y1.2 Y1.4 | length 74.6
  L1(signal) w0.254: v1(81.153,83.439) Y1.4@82.169,83.439 ; v1(82.296,87.757) P1.2@82.296,88.773 ; Y1.4 83.363,83.527 83.512,83.378 83.512,82.792 83.704,82.6 83.817,82.6 83.966,82.451 83.966,82.3 84.439,81.827 Y1.2 ; v1(85.598,75.184) 85.598,76.222 cw(c86.465,76.222) C7.1@85.852,76.835 ; v1(88.392,62.103) C2.1@88.392,63.119 ; v1(88.392,83.185) 88.392,83.312 C10.1 ; v1(88.773,74.803) R4.1 ; v1(90.805,58.547) C11.1 ; C9.1 91.44,80.899 v1(92.71,80.899) ; v1(91.948,78.359) 93.726,78.359 93.974,78.111 94.293,78.111 94.415,77.989 U1.8 ; v1(94.234,60.325) 95.685,60.325 R1.1@95.758,60.398 ; v1(94.488,56.261) Q1.1@95.504,56.261 ; v1(95.406,83.976) 95.415,83.985 95.939,83.985 95.939,84.128 R1.1@96.012,84.201 ; v1@95.406,83.985 95.25,83.985 95.335,83.899 95.335,83.628 96.244,82.72 96.244,82.578 96.274,82.548 96.274,82.177 U1.47 ; C1.1@96.901,90.424 96.647,90.17 v1(98.425,90.17) ; C2.1@96.901,93.091 96.774,92.964 v1(98.425,92.964) 99.638,92.964 U2.1 ; C3.1 97.028,95.631 v1(98.425,95.631) ; C6.1@99.506,97.093 C6.1 100.076,97.663 v1(100.076,99.187) ; v1(99.949,90.805) 100.448,90.306 U2.7@100.448,89.798 ; U2.7 100.639,89.732 100.639,89.205 101.573,89.205 101.765,89.397 101.765,89.459 U2.5 ; U1.23 100.782,76.489 U1.49 100.782,80.989 U1.35 102.833,80.989 102.867,81.023 v1(104.051,81.023) ; v1(101.854,85.725) J1.01@101.854,86.741 ; D1.2@102.235,61.206 102.331,61.11 103.167,61.11 103.511,60.767 103.991,60.767 104.14,60.618 v1@104.14,59.615 ; C5.1 v1(102.362,99.314) ; v1(102.616,69.469) C8.2 ; C4.1@104.775,97.79 104.902,97.917 v1(104.902,99.441) ; U3.17 U3.16 U3.15 U3.14 ; U3.14@105.283,70.104 v1(106.299,70.104) ; v1(112.268,53.594) J2.2@113.284,53.594 ; v1(112.649,70.104) U3.7@114.173,70.104 ; U3.4 U3.5 U3.6 U3.7 ; C1.1@116.84,75.311 v1(116.84,74.295) 116.84,74.26 117.221,73.879 C12.1 ; J4.2@129.54,87.63 130.302,86.868 v1(130.302,83.82)
  other v1: 74.14,49.69 84.14,49.69 89.14,49.69 94.14,49.69 99.14,49.69 104.14,49.69 109.14,49.69 114.14,49.69 119.14,49.69 124.14,49.69 129.14,49.69 134.14,49.69 76.64,54.69 81.64,54.69 86.64,54.69 91.64,54.69 106.64,54.69 111.64,54.69 116.64,54.69 121.64,54.69 126.64,54.69 131.64,54.69 136.64,54.69 141.64,54.69 74.14,59.69 79.14,59.69 84.14,59.69 89.14,59.69 104.14,59.69 109.14,59.69 114.14,59.69 119.14,59.69 124.14,59.69 134.14,59.69 139.14,59.69 76.64,64.69 81.64,64.69 86.64,64.69 91.64,64.69 111.64,64.69 126.64,64.69 131.64,64.69 136.64,64.69 141.64,64.69 74.14,69.69 79.14,69.69 84.14,69.69 109.14,69.69 119.14,69.69 124.14,69.69 134.14,69.69 139.14,69.69 76.64,74.69 81.64,74.69 111.64,74.69 121.64,74.69 126.64,74.69 131.64,74.69 136.64,74.69 141.64,74.69 74.14,79.69 79.14,79.69 119.14,79.69 124.14,79.69 129.14,79.69 134.14,79.69 139.14,79.69 114.225,79.775 76.64,84.69 81.64,84.69 86.64,84.69 126.64,84.69 131.64,84.69 136.64,84.69 141.64,84.69 79.207,89.623 74.14,89.69 84.14,89.69 89.14,89.69 104.14,89.69 109.14,89.69 114.14,89.69 119.14,89.69 124.14,89.69 129.14,89.69 134.14,89.69 139.14,89.69 76.64,94.69 81.64,94.69 86.64,94.69 91.64,94.69 106.64,94.69 111.64,94.69 116.64,94.69 121.64,94.69 126.64,94.69 131.64,94.69 136.64,94.69 141.64,94.69 74.14,99.69 84.14,99.69 89.14,99.69 94.14,99.69 109.14,99.69 114.14,99.69 119.14,99.69 124.14,99.69 129.14,99.69 134.14,99.69
"MCU NRST": J1.04 R2.2 U1.7 | length 35.2
  L1(signal) w0.254: v1(80.518,78.105) 80.537,78.124 82.785,78.124 R2.2 84.776,78.143 84.925,78.292 84.925,79.191 85.117,79.383 86.587,79.383 86.779,79.191 86.779,78.81 87.613,77.976 88.042,77.976 89.079,79.013 93.781,79.013 94.221,78.573 94.402,78.573 94.478,78.497 95.094,78.497 U1.7
  L4(signal) w0.254: v1(80.518,78.105) 81.837,79.424 83.488,79.424 88.773,84.709 93.396,84.709 93.98,85.293 v1(93.98,85.339) ; v1@94.107,85.339 94.107,86.741 J1.04
"MCU SWCLK": J1.03 U1.37 | length 8
  L1(signal) w0.254: J1.03 97.883,86.868 98.895,85.856 99.684,85.856 101.723,83.817 101.723,83.435 101.282,82.994 U1.37
"MCU SWDIO": J1.02 U1.34 | length 12.6
  L1(signal) w0.254: J1.02 99.616,86.868 99.925,86.559 100.004,86.559 102.536,84.027 102.68,84.027 103.077,83.63 103.077,82.376 104.579,82.376 104.728,82.227 104.728,80.646 104.478,80.396 103.373,80.396 103.28,80.489 U1.34
NetC8_1: C8.1 U1.22 | length 4.6
  L1(signal) w0.254: U1.22 100.29,75.301 100.29,74.788 101.926,73.152 102.467,73.152 102.616,73.003 C8.1
NetD1_1: D1.1 R5.2 | length 13.6
  L1(signal) w0.254: v1(100.33,61.214) 101.303,60.241 102.192,60.241 D1.1@102.235,60.198 ; R5.2 100.755,70.447 100.828,70.374 100.828,69.981 100.965,69.844 v1(100.965,69.723)
  L4(signal) w0.254: v1(100.33,61.214) 100.33,63.627 102.543,65.84 102.543,67.638 102.236,67.945 100.975,69.207 100.975,69.713 v1(100.965,69.723)
NetD2_1: D2.1 Q1.2 | length 30.2
  L1(signal) w0.254: Q1.2@96.389,53.975 100.076,53.975 D2.1 ; v1(97.536,58.42) 97.536,58.43 D2.1 ; v1(101.866,67.183) v1@101.916,67.233 ; Q1.2@102.239,53.975 102.239,57.348 101.157,58.43 D2.1
  L4(signal) w0.254: v1(97.536,58.42) 97.536,67.459 101.494,67.459 101.77,67.183 v1(101.866,67.183)
NetD2_2: D2.2 R1.2@97.574,60.325 | length 3.2
  L1(signal) w0.254: R1.2@97.574,60.452 100.076,60.452 D2.2
NetFL1_2: FL1.2 Q1.3 | length 3.5
  L1(signal) w0.254: FL1.2 95.219,52.27 95.814,51.675 Q1.3
NetJ2_1: J2.1 LS1.N | length 12.2
  L1(signal) w0.254: J2.1 121.041,51.054 LS1.N
NetJ3_1: J3.1 U3.3 | length 8.1
  L1(signal) w0.254: U3.3 120.245,65.024 J3.1
NetJ3_2: J3.2 U3.8 | length 7.6
  L1(signal) w0.254: U3.8 114.369,71.217 121.552,71.217 J3.2
NetLED2_4: LED2.4 R9.1 | length 4.7
  L1(signal) w0.254: R9.1 97.841,70.231 97.914,70.158 97.914,69.799 99.987,67.726 LED2.4
NetLED2_5: LED2.5 R8.1 | length 6.4
  L1(signal) w0.254: R8.1 95.301,70.18 95.301,69.799 97.282,67.818 98.895,67.818 99.044,67.669 99.044,66.577 LED2.5
NetLED2_6: LED2.6 R7.1 | length 4.8
  L1(signal) w0.254: R7.1@94.615,64.516 96.837,64.516 98.387,66.065 LED2.6
NetP1_3: P1.3 U1.45 | length 15
  L1(signal) w0.254: P1.3 92.122,84.662 94.462,84.662 94.462,84.814 94.61,84.963 95.964,84.963 95.979,84.948 97.133,84.948 97.282,84.799 U1.45
NetR1_2: R1.2@97.828,83.947 U1.44 | length 2.1
  L1(signal) w0.254: U1.44 97.79,82.177 97.79,84.163 R1.2@97.828,84.201
NetR5_1: R5.1 U1.21 | length 3.3
  L1(signal) w0.254: U1.21 99.782,73.946 100.33,73.398 R5.1
"OSC IN": C10.2 U1.5 Y1.3 | length 13.4
  L1(signal) w0.254: Y1.3 84.639,83.527 85.781,82.385 90.621,82.385 90.997,82.761 90.997,82.839 91.44,83.282 93.703,81.019 93.703,80.375 94.581,79.497 95.094,79.497 U1.5
"OSC OUT": C9.2 U1.6 Y1.1 | length 14.1
  L1(signal) w0.254: Y1.1 82.439,81.827 83.494,80.772 C9.2 90.359,80.329 90.359,80.099 90.829,79.629 93.807,79.629 94.409,79.027 94.693,79.027 94.723,78.997 95.094,78.997 U1.6
SCL: U1.42 U2.4 | length 19.1
  L1(signal) w0.254: U1.42 98.79,82.177 98.79,82.69 99.133,83.033 99.133,84.825 98.102,85.856 96.355,85.856 95.762,86.449 95.762,87.287 96.723,88.248 102.058,88.248 103.019,89.209 103.019,90.529 102.038,91.51 U2.4
SDA: U1.43 U2.3 | length 19.3
  L1(signal) w0.254: U1.43 98.29,82.177 98.29,82.548 98.32,82.578 98.32,82.862 98.679,83.221 98.679,84.637 97.914,85.402 96.167,85.402 95.308,86.261 95.308,87.561 96.393,88.646 101.814,88.646 102.565,89.397 102.565,90.33 101.238,91.657 U2.3
USB_D_N: U1.32 X1.2 | length 12.8
  L1(signal) w0.208: U1.32 112.03,79.489 113.299,80.757 113.299,81.549 X1.2
USB_D_P: U1.33 X1.3 | length 16.3
  L1(signal) w0.208: U1.33 101.993,80.02 102.385,80.02 102.415,80.05 105.08,80.05 105.41,80.38 105.41,82.428 105.532,82.55 108.826,82.55 108.947,82.672 108.947,84.678 109.067,84.798 112.095,84.858 112.183,84.858 112.244,84.797 X1.3@113.391,83.65
VBUS: C1.2@118.237,75.565 FL1.1 X1.1 | length 73
  L1(signal) w0.254: FL1.1 104.118,50.8 104.267,50.949 v1(104.267,57.15) ; C1.2@118.491,75.692 v1(119.888,75.692)
  L4(signal) w0.254: v1(104.267,57.15) 104.902,57.785 104.902,75.898 102.854,77.946 102.854,80.339 99.399,83.794 99.399,84.354 99.796,84.751 100.356,84.751 101.723,83.385 101.723,83.069 103.142,81.65 110.891,81.65 111.478,81.063 115.453,77.088 115.483,77.071 117.915,75.692 118.02,75.692 v1(119.888,75.692)
pads on no net: C7.2 C11.2 C12.2 J2.3 J4.3 R6.1 RT1.1 U1.2 U1.3 U1.4 U1.18 U1.19 U1.20 U1.25 U1.26 U1.27 U1.28 U1.39 U1.40 U1.41 U1.46 U3.13 U3.18 X1.P1 X1.P2

## Polygon pours and split planes (outlines as drawn)
GND on L2(GND) "GND_L02_P000" (solid, remove dead copper, pour order 0): 78.232,103.632 138.811,103.632 139.065,103.378 139.7,103.378 140.335,102.743 140.716,102.743 142.113,101.346 142.113,100.965 142.494,100.584 142.494,99.822 143.383,98.933 143.383,49.784 143.256,49.657 143.256,49.022 142.494,48.26 142.494,47.625 140.97,46.101 140.716,46.101 140.335,45.72 cw(c138.802,47.253) 138.802,45.085 78.793,45.085 cw(c78.793,45.519) 78.486,45.212 77.807,45.212 cw(c77.807,46.946) 76.581,45.72 cw(c76.581,46.333) 76.147,45.9 73.66,48.387 cw(c74.58,49.307) 73.279,49.307 73.279,99.024 cw(c75.819,99.024) 74.023,100.82 76.091,102.888 cw(c77.887,101.092) 77.887,103.632 80.465,103.632 ccw(c80.465,104.066) 80.772,103.759
GND on L3(GND) "GND_L03_P001" (solid, remove dead copper, pour order 1): 78.359,103.889 138.938,103.889 139.192,103.635 139.827,103.635 140.462,103 140.843,103 142.24,101.603 142.24,101.222 142.621,100.841 142.621,100.079 143.51,99.19 143.51,50.041 143.383,49.914 143.383,49.279 142.621,48.517 142.621,47.882 141.097,46.358 140.843,46.358 140.462,45.977 cw(c138.929,47.51) 138.929,45.342 78.92,45.342 cw(c78.92,45.775) 78.613,45.469 77.934,45.469 cw(c77.934,47.203) 76.708,45.977 cw(c76.708,46.59) 76.274,46.156 73.787,48.644 cw(c74.707,49.563) 73.406,49.563 73.406,99.281 cw(c75.946,99.281) 74.15,101.077 76.218,103.145 cw(c78.014,101.349) 78.014,103.889 80.592,103.889 ccw(c80.592,104.322) 80.899,104.016

## Silkscreen, mask and mechanical layers (free items; w line width, h text height)
Top Courtyard:
  the board outline again, w0.254